# Altium PCB USB-OLED.PcbDoc
Units mil, origin at the board's own origin, x right, y up, seen from the top; angles counter-clockwise.
Board outline 1574.8 x 472.44 mil, 2 copper layers (Top Layer, Bottom Layer); 26 components, 22 nets, 106 pads, 34 vias.
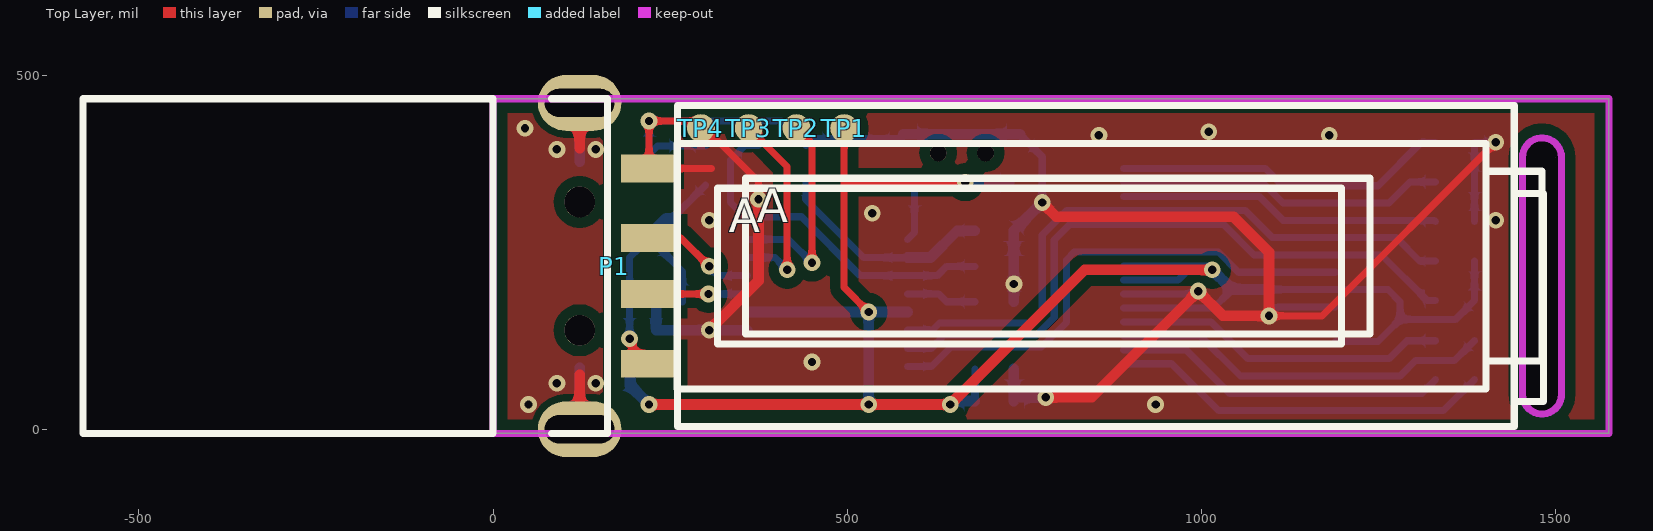
[diagram p0: Top Layer view]
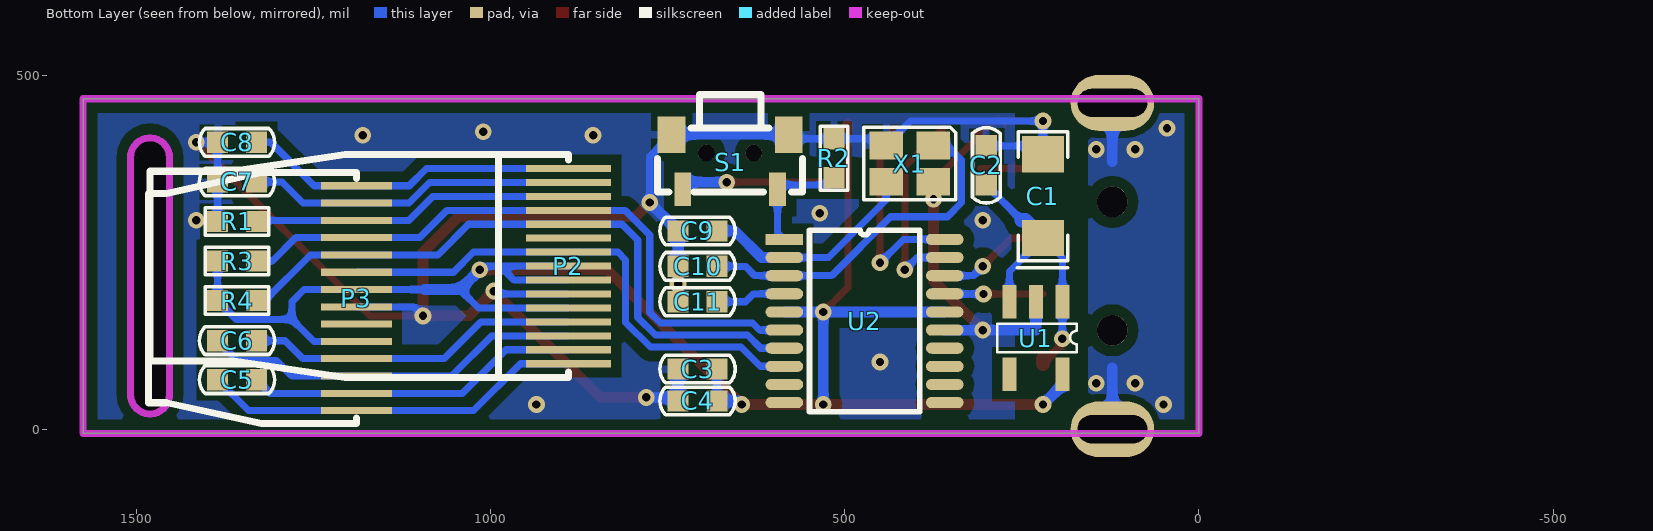
[diagram p1: Bottom Layer view, seen from below]
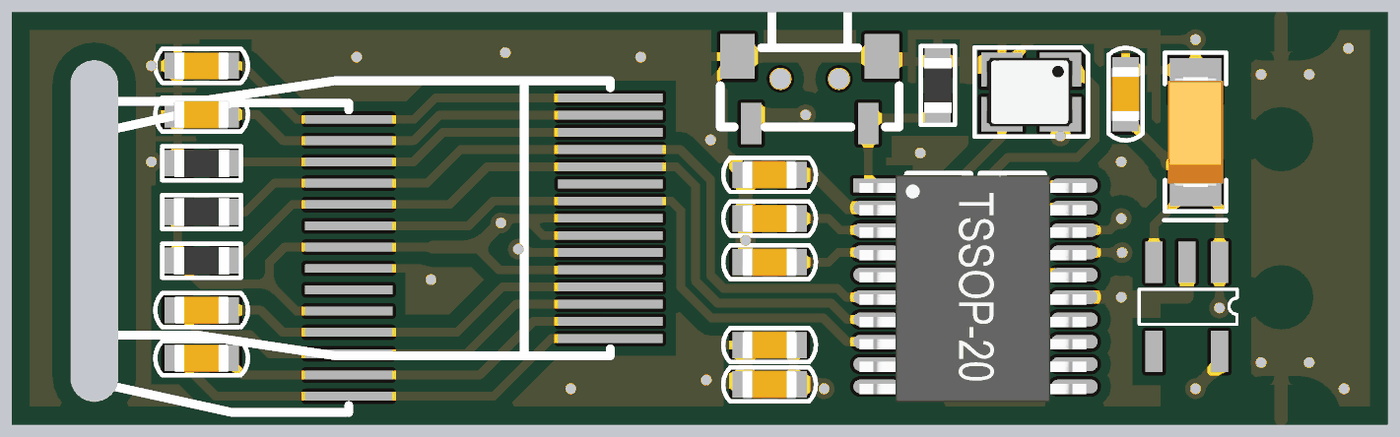
[diagram p2: 3D render of the assembled board from below, using the file's embedded part models]

## Layer stack, top to bottom
Top Solder: solder mask 0.4, Solder Resist, Dk 3.5
Top Layer: signal copper 1.4
Dielectric 1: dielectric 12.6, FR-4, Dk 4.8
Bottom Layer: signal copper 1.4
Bottom Solder: solder mask 0.4, Solder Resist, Dk 3.5

## Board outline
0,-5.91 0,466.54 1574.8,466.54 1574.8,-5.91
cut-out: 1507.87,383.86 ccw(c1480.32,383.86) 1480.32,411.42 ccw(c1480.31,383.86) 1452.76,383.86 1452.76,47.63 ccw(c1480.38,47.59) 1480.42,19.96 ccw(c1480.42,47.42) 1507.87,47.42
cut-out: 1507.87,383.86
cut-out: 1500,383.86
cut-out: 1500,383.86

## Design rules (kind name [scope] priority, off if disabled: settings)
Clearance Clearance_1 [(InLayerClass('Keep Out'))] p1: gap=15 ignorepadtopadclearanceinfootprint=FALSE
Clearance Clearance-polygon [InPoly] p2: gap=15 ignorepadtopadclearanceinfootprint=FALSE
Clearance [All] p3: gap=7 ignorepadtopadclearanceinfootprint=FALSE
PlaneConnect [All] p1: planeconnectstyle=Direct reliefexpansion=20 reliefentries=4 reliefconductorwidth=10 reliefairgap=10
PolygonConnect via [IsVia] p1: connectstyle=Direct reliefconductorwidth=10 reliefentries=4 polygonreliefangle="90 Angle" airgapwidth=10
PolygonConnect [All] p2: connectstyle=Relief reliefconductorwidth=10 reliefentries=4 polygonreliefangle="90 Angle" airgapwidth=10
RoutingVias [All] p1: holewidth=11.81 width=23.62 viastyle="Through Hole" minholewidth=11.81 minwidth=23.62 maxholewidth=28 maxwidth=50
SolderMaskExpansion [All] p1: expansion=4
Width [All] p1: maxlimit=100 minlimit=7 preferedwidth=10
29 further rules are at their usual default settings.

## Components (designator, comment, footprint, x,y, rotation, side; value= is the part's Value field where it differs from the comment)
C1 "33uF" C1206/A 220,270 r90 bottom
C2 "100nF" C0603 300,345 r90 bottom
C3 "100nF" C0603 735,85 r180 bottom
C4 "2.2uF" C0603 680,40 r0 bottom
C5 "1uF" C0603 1330,70 r0 bottom
C6 "1uF" C0603 1330,125 r0 bottom
C7 "1uF" C0603 1330,349.17 r0 bottom
C8 "1uF" C0603 1330,405 r0 bottom
C9 "6pF" C0603 680,280 r0 bottom
C10 "6pF" C0603 735,230 r180 bottom
C11 "100nF" C0603 735,180 r180 bottom
P1 "USB-AP" USB-AP-SMT -578.74,-5.91 r0 top locked
P2 "VGM12832" VGM12832B 259.84,57.09 r0 top locked
P3 "VGM12832-14" VGW12832-14 260,90.55 r0 top locked
R1 "390K" R0603 1385,293.33 r180 bottom
R2 "100K" R0603 515,355 r90 bottom
R3 "10K" R0603 1330,237.5 r0 bottom
R4 "10K" R0603 1330,181.67 r0 bottom
S1 "SW-PB" TS-1806B 661.54,390 r270 bottom
TP1 "TP" TESTPOINT 495,430 r90 top
TP2 "TP" TESTPOINT 427.63,430 r90 top
TP3 "TP" TESTPOINT 360.26,430 r90 top
TP4 "TP" TESTPOINT 292.89,430 r90 top
U1 "RT9193-18G" SOT23-5 192.6,180 r270 bottom
U2 "STM32F072F6" TSSOP20 585,267.95 r180 bottom
X1 "8MHz" NX2520 410,375 r0 bottom

## Footprints (in the part's own frame and the unit in brackets; to place one, negate y for a bottom-side part, rotate by r counter-clockwise, add the part's x,y. Pads: shape width x height; smd on the part's side, far side on the other; paste and mask are expansions set on the pad)
C0603 [mil]
  rect 30x30 smd: 1(0,0) 2(55,0)
  silkscreen extent -26,-19 81,19, body extent -11,-20 66,20, height 31
C1206/A [mm]
  rect 1.3x1.5 smd: 1(0,0) 2(3,0)
  silkscreen extent -1.07,-0.89 3.81,0.91, body extent -0.18,-0.8 3.38,0.8, height 1.8
NX2520 [mm]
  rect 1.2x1 smd: 1(-0.9,-0.65) 2(0.8,-0.65) 3(0.8,0.65) 4(-0.9,0.65)
  silkscreen extent -1.7,-1.3 1.6,1.3, body extent -1.25,-1 1.25,1, height 0.79
R0603 [mil]
  rect 30x30 smd: 1(0,0) 2(55,0)
  silkscreen extent -18,-19 73,19, body extent -4,-16 59,16, height 18
SOT23-5 [mm]
  rect 1.2x0.5 smd: 1(0,0) 2(0,-0.95) 3(0,-1.9) 4(2.6,-1.9) 5(2.6,0)
  silkscreen extent 0.79,-2.33 1.8,0.52, body extent -0.33,-2.41 2.87,0.64, height 1
TESTPOINT [mm]
  round 1 smd: 1(-0.127,-0.012)
TS-1806B [mm]
  rect 1.2x0.6 smd: 1(1.3,-1.7) 2(1.3,1.7)
  rect 1.3x1 smd: 3(-0.65,-2.1) 4(-0.65,2.1)
  round 0.6 hole 0.6: ""(0,-0.85) ""(0,0.85)
  silkscreen extent -2.1,-2.6 1.4,2.6, body extent -2.1,-2.6 1.4,2.6, height 1.9
TSSOP20 [mm]
  rect 1.35x0.4 smd: 1(0,0)
  oval 1.35x0.4 smd: 2(0,-0.65) 3(0,-1.3) 4(0,-1.95) 5(0,-2.6) 6(0,-3.25) 7(0,-3.9) 8(0,-4.55) 9(0,-5.2) 10(0,-5.85) 11(5.75,-5.85) 12(5.75,-5.2) 13(5.75,-4.55) 14(5.75,-3.9) 15(5.75,-3.25) 16(5.75,-2.6) 17(5.75,-1.95) 18(5.75,-1.3) 19(5.75,-0.65) 20(5.75,0)
  silkscreen extent 0.9,-6.18 4.85,0.33, body extent -0.5,-6.3 6.1,0.3, height 1.2
USB-AP-SMT [mm]
  round 1.1 hole 1.1: 0(17.8,3.7) 0(17.8,8.3)
  rect 2x1 smd: 1(20.29,2.5) 2(20.29,5) 3(20.29,7) 4(20.29,9.5)
  oval 3x2 hole 1 slot 2.5 at 0 deg: 5(17.8,11.85) 6(17.8,0.15)
  silkscreen extent 0,0 18.8,12, body extent 0,0 18.33,12.01, height 1.78
VGM12832B [mil]
  rect 120x10 smd far side: 1(629.92,35.43) 2(629.92,55.12) 3(629.92,74.8) 4(629.92,94.49) 5(629.92,114.17) 6(629.92,133.86) 7(629.92,153.54) 8(629.92,173.23) 9(629.92,192.91) 10(629.92,212.6) 11(629.92,232.28) 12(629.92,251.97) 13(629.92,271.65) 14(629.92,291.34) 15(629.92,311.02)
  silkscreen extent 0,0 1220,346, body extent 0,0 1220,346, height 130
VGW12832-14 [mm]
  rect 2.54x0.254 smd far side: 1(23.6,-1.63) 2(23.6,-1.01) 3(23.6,-0.39) 4(23.6,0.23) 5(23.6,0.85) 6(23.6,1.47) 7(23.6,2.09) 8(23.6,2.71) 9(23.6,3.33) 10(23.6,3.95) 11(23.6,4.57) 12(23.6,5.19) 13(23.6,5.81) 14(23.6,6.43)
  silkscreen extent 0,-2.2 31.05,9.3

## Part data
C1: library part CAP1206/A, "电容"
C2 C3 C5 C6 C9 C10 C11: library part CAP, "电容", Text Field1=20, Text Field2=10
C4 C7 C8: library part CAP0805, "电容", Text Field1=20, Text Field2=10
R1 R2 R3 R4: library part RES, "电阻"
S1: "Switch", LatestRevisionDate=17-Jul-2002, LatestRevisionNote="Re-released for DXP Platform.", PackageDescription="Switch; 2 Leads", PackageReference=SPST-2, Published=24-Mar-1999, Publisher="Altium Limited"
TP1 TP2 TP3 TP4: "测试点", Part Field 1=20, Part Field 2=20
U1: library part RT9193, "оƬ", Text Field1=70, Text Field2=60
X1: library part CRYSTAL4, "晶振"

## Via types
v1: diameter 23.62, hole 11.81, Top Layer to Bottom Layer, tented both sides, 34 vias

## Nets (pads, with @x,y where several pads share a name; then routed paths per layer and width w, separated by ;. In a path a pad name is that pad's centre, name@x,y a point inside that pad or via, vN(x,y) a via of type N, cw(c..) or ccw(c..) an arc to the next point about the centre after c; other vN are vias at no path point)
3V3: C3.2 C4.1 P2.5 P2.7 P2.8 P3.5 P3.8 R3.2 R4.2 S1.1 TP1.1 U1.5 U2.5 U2.16 | length 2860.4
  Top Layer w10: TP1.1 495.45,350 ; v1(530,165.59) 495.45,200.14 495.45,350 ; v1(666.18,348.82) 496.63,348.82 495.45,350
  Top Layer w15: v1(220,35) v1(530,35) v1(645,35) 835,225 v1(1015,225) ; TP1.1 TP1.1@495.45,430.78
  Bottom Layer w10: C4.1 C3.2 ; P2.5 889.83,171.19 1016.7,171.19 1042.76,197.24 ; P2.7 966.88,210.63 986.56,230.31 ; P2.8 986.56,230.31 ; v1(1015,225) 1009.69,230.31 986.56,230.31 ; 1092.76,197.24 P3.8 1262.76,197.24 1280,180 1280,155 ; P3.5 1249.02,124.02 1280,155 ; R3.2 R4.2 1358,154.67 1310.03,154.67 1309.7,155 1280,155
  Bottom Layer w15: U1.5 192.6,62.4 v1(220,35) ; U2.16 v1(530,165.59) ; v1(530,35) v1(530,165.59) ; U2.5 v1(530,165.59) ; v1(645,35) 650,40 C4.1 ; v1(666.18,348.82) S1.1@728.46,348.82 ; v1(1015,225) 1042.76,197.24 1092.76,197.24
DM: P1.2 U2.17 | length 138.6
  Top Layer w10: P1.2 v1(304.06,190.94)
  Bottom Layer w10: v1(304.06,190.94) 358.39,190.94 U2.17
DP: P1.3 U2.18 | length 160.5
  Top Layer w10: P1.3 265.31,269.69 v1(305,230)
  Bottom Layer w10: v1(305,230) 318.23,216.77 U2.18
GND: C1.2 C2.2 C3.1 C4.2 C7.2 C8.2 C9.2 C10.1 C11.1 P1.4 P2.6 P3.7 R1.1 R2.2 S1.3 S1.4 TP4.1 U1.2 U2.15 X1.2 X1.4 | length 3384.5
  Top Layer w10: 308.11,368.11 P1.4 220.08,434.92 v1(220,435) 289.12,435 374.57,349.55 v1(374.57,324.57) ; v1(1095,160) 1170,160 v1(1415,405)
  Top Layer w15: v1(305,140) 374.57,209.57 v1(374.57,324.57) ; v1(775,320) 795,300 1045,300 1095,250 v1(1095,160) 1030,160 v1(995,195) 845,45 v1(780,45)
  Bottom Layer w10: v1@300,140 v1(305,140) ; C2.2 231.89,400 C1.2 v1(220,435) 407.09,435 X1.2 450.91,410 R2.2 573.27,410 S1.4 ; S1.3 775,384.8 v1(775,320) ; P2.6 990.94,190.94 v1(995,195) ; v1(1095,160) 1107.83,172.83 P3.7 ; R1.1 C7.2 C8.2 v1(1415,405)
  Bottom Layer w15: U1.2 230,140 v1@300,140 ; v1(305,140) U2.15 ; S1.4 578.86,416.31 743.49,416.31 S1.3 ; C4.2 C4.2@735,45 ; C3.1 C4.2@735,45 ; C11.1 v1(735,205) C10.1 C9.2 v1(775,320) ; v1(780,45) C4.2@735,45
  other v1: 935,35 450,95 305,295 1415,295 535,305 855,415 1180,415 1010,420
NetC5_1: C5.1 P2.2 P3.2 | length 473.6
  Bottom Layer w10: P2.2 977.8,112.2 1039.21,50.79 P3.2 1310.79,50.79 C5.1
NetC5_2: C5.2 P2.1 P3.1 | length 540.7
  Bottom Layer w10: P2.1 957.48,92.52 1023.62,26.38 P3.1 1341.38,26.38 C5.2
NetC6_1: C6.1 P2.4 P3.4 | length 472.3
  Bottom Layer w10: P2.4 1013.43,151.57 1065.39,99.61 P3.4 1264.61,99.61 1290,125 C6.1
NetC6_2: C6.2 P2.3 P3.3 | length 539.3
  Bottom Layer w10: P2.3 998.11,131.89 1054.8,75.2 P3.3 1280.2,75.2 1302,97 1357,97 C6.2
NetC7_1: C7.1 P2.14 P3.13 | length 464.7
  Bottom Layer w10: P2.14 1085.62,348.42 1114.75,319.29 P3.13 1264.29,319.29 1294.17,349.17 C7.1
NetC8_1: C8.1 P2.15 P3.14 | length 520.3
  Bottom Layer w10: P2.15 1089.97,368.11 1114.38,343.7 P3.14 ; P3.14@1233.7,343.7 P3.14 ; C8.1 1310,405 1248.7,343.7 P3.14
NetC9_1: C9.1 U2.2 X1.3 | length 313.6
  Bottom Layer w10: X1.3 441.5,323.5 522.64,242.36 U2.2
  Bottom Layer w15: U2.2 617.36,242.36 655,280 C9.1
NetC10_2: C10.2 U2.3 X1.1 | length 501.3
  Bottom Layer w10: X1.1 355.59,400.59 335,380 335,320 355,300 435,300 518.23,216.77 626.77,216.77 640,230 C10.2
NetC11_2: C11.2 U2.4 | length 99.6
  Bottom Layer w10: U2.4 628.82,191.18 640,180 C11.2
NetP1_5: P1.5 P1.6 | length 310.4
  Top Layer w15: P1.6 122.05,77.05 ; 122.05,397.05 P1.5
  Bottom Layer w15: P1.6 122.05,87.05 ; 122.05,377.95 P1.5
  other v1: 50,35 90,65 145,65 90,395 145,395 45,425
NetP2_13: P2.13 P3.12 R1.2 | length 454.9
  Bottom Layer w10: P2.13 1081.26,328.74 1115.12,294.88 P3.12 1328.45,294.88 R1.2
NetR2_1: R2.1 S1.2 U2.1 | length 161
  Bottom Layer w10: R2.1@520,345 590.79,345 594.61,348.82 594.61,277.56 U2.1
RES: P2.9 P3.9 U2.8 | length 734.2
  Bottom Layer w10: U2.8 618.82,88.82 646,116 774.08,116 809,150.92 809,239 820,250 P2.9 1023.67,250 1052.02,221.65 P3.9
SCL: P2.11 P3.10 R4.1 U2.7 | length 926
  Bottom Layer w10: U2.7 618.45,114.41 637.04,133 767.04,133 792,157.96 792,267 814.37,289.37 P2.11 1030.63,289.37 1073.94,246.06 P3.10 1253.94,246.06 1318.33,181.67 R4.1
SDA: P2.12 P3.11 R3.1 U2.6 | length 908.5
  Bottom Layer w10: U2.6 620,140 630,150 760,150 775,165 775,274.04 810.01,309.05 P2.12 1060.95,309.05 1099.53,270.47 P3.11 1274.53,270.47 1307.5,237.5 R3.1
SWCLK: TP2.1 U2.20 | length 304.1
  Top Layer w10: TP2.1 450,403.08 v1(450,235)
  Bottom Layer w10: U2.20 417.05,267.95 v1(450,235)
SWIO: TP3.1 U2.19 | length 286.1
  Top Layer w10: TP3.1 415,370.71 v1(415,225)
  Bottom Layer w10: U2.19 397.64,242.36 v1(415,225)
VBUS: C1.1 C2.1 P1.1 U1.1 U1.3 | length 428.3
  Top Layer w10: v1(192.6,127.6) 192.6,120 P1.1
  Top Layer w20: P1.1 P1.1@220.08,99.92
  Bottom Layer w10: v1(192.6,127.6) U1.1 192.6,242.6 C1.1 267.4,222.6 U1.3 ; 250,295 C2.1
  Bottom Layer w20: C1.1 245,295 250,295
pads on no net: P1.0 P2.10 P3.6 S1. U1.4 U2.9 U2.10 U2.11 U2.12 U2.13 U2.14

## Polygon pours and split planes (outlines as drawn)
GND on Top Layer "Top Layer-GND" (solid, pour order 16): 260,460.63 260,0 1574.8,0 1574.8,460.63
NetP1_5 on Top Layer "Top Layer-NetP1_5" (solid, remove dead copper, pour order 6): 155,460.63 0,460.63 0,0 155,0
NetP1_5 on Top Layer "Top Layer-NetP1_5 1" (solid, pour order 8): 35,555
GND on Bottom Layer "Bottom Layer-GND" (solid, pour order 14): 260,460.63 260,0 1574.8,0 1574.8,460.63
NetP1_5 on Bottom Layer "Bottom Layer-NetP1_5" (solid, remove dead copper, pour order 12): 156.38,462.24 1.38,462.24 1.38,1.61 156.38,1.61

## Keep-outs
Keep-Out Layer:
  lines w10: 1452.76,49.21 ccw(c1480.32,49.21) 1507.87,49.21 1507.87,383.86 ccw(c1480.32,383.86) 1452.76,383.86 1452.76,50 ; 0,-5.91 1574.8,-5.91 1574.8,466.54 0,466.54 0,-5.91

## Text inside footprints (layer, text, board x,y; h text height)
P2: Top Overlay "A" at 332.28,277.95 h47.24
P3: Top Overlay "A" at 372.2,292.13 h47.24